# Altium PCB RawLEDArray.PcbDoc
Units mil, origin at the board's own origin, x right, y up, seen from the top; angles counter-clockwise.
Board outline 6000 x 4000 mil, 2 copper layers (Top Layer, Bottom Layer); 185 components, 96 nets, 557 pads, 0 vias.
Unrouted connection lines stored in the file: 460.
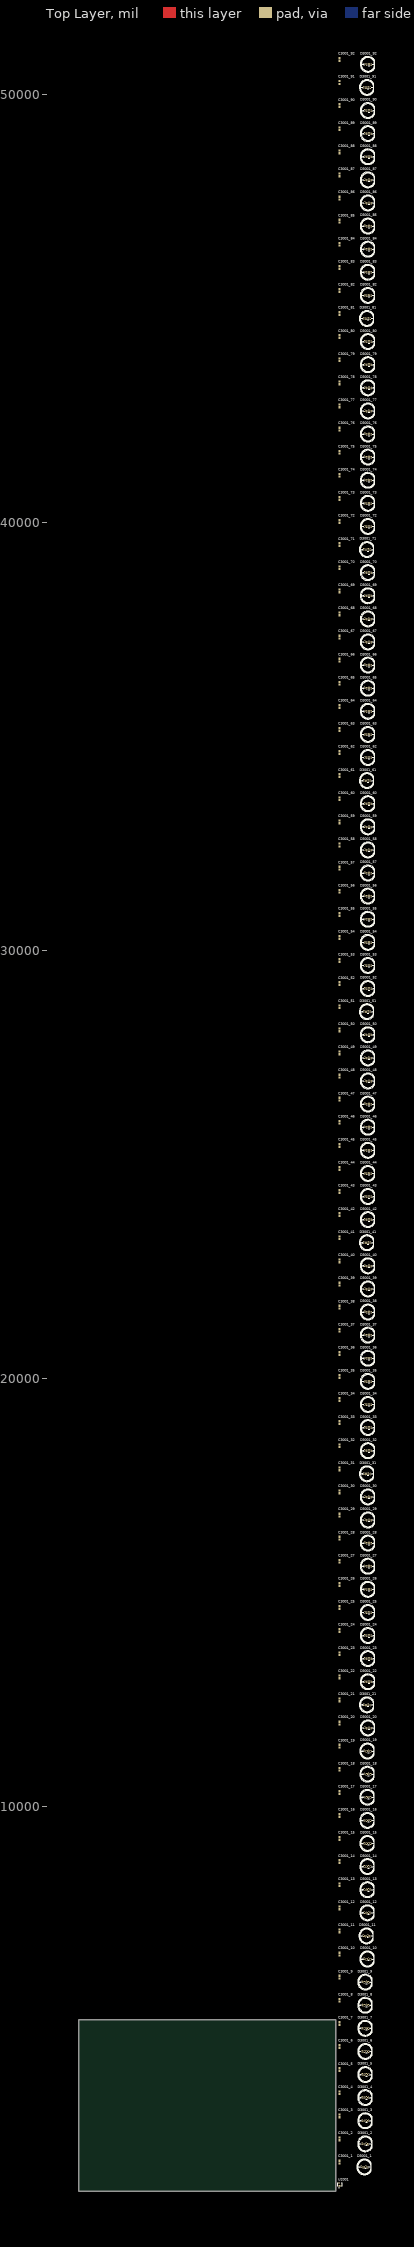
[diagram p0: Top Layer view]
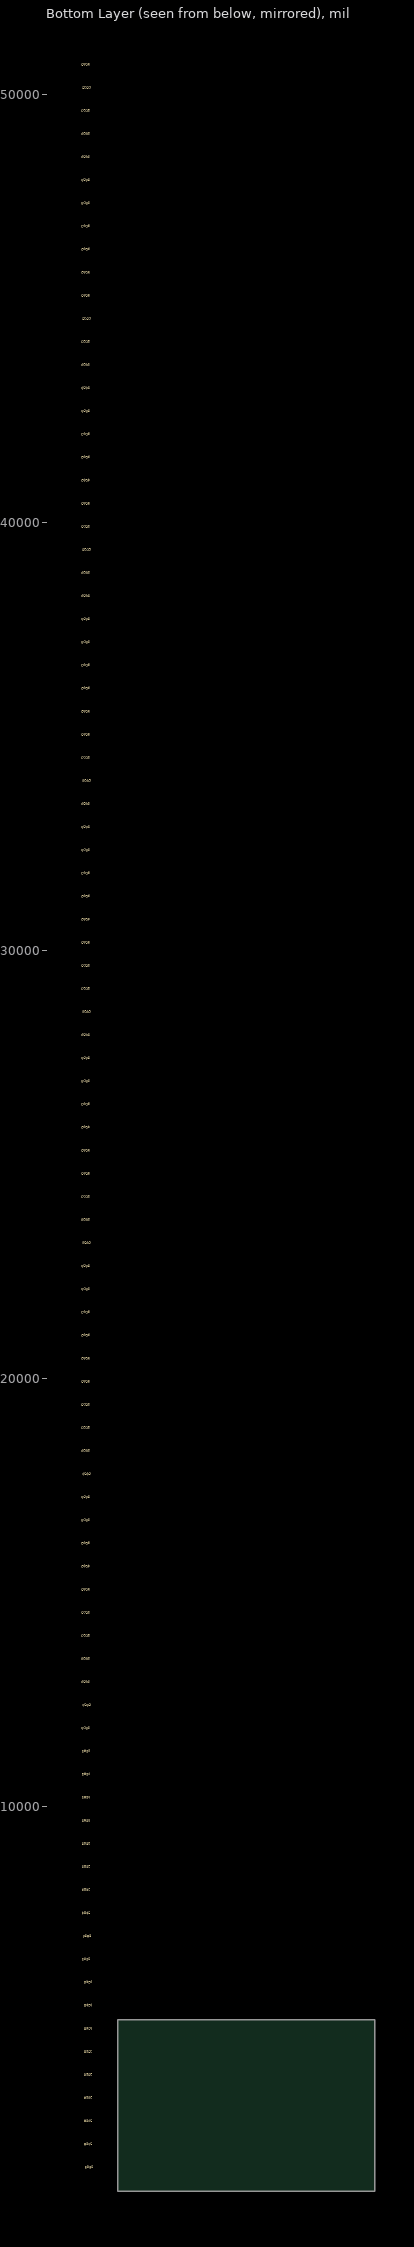
[diagram p1: Bottom Layer view, seen from below]

## Layer stack, top to bottom
Top Solder: solder mask 0.4, Solder Resist, Dk 3.5
Top Layer: signal copper 1.4
Dielectric 1: dielectric 12.6, FR-4, Dk 4.8
Bottom Layer: signal copper 1.4
Bottom Solder: solder mask 0.4, Solder Resist, Dk 3.5

## Board outline
1000,1000 7000,1000 7000,5000 1000,5000

## Design rules (kind name [scope] priority, off if disabled: settings)
Clearance [All] p1: gap=10 ignorepadtopadclearanceinfootprint=FALSE
PolygonConnect [All] p1: connectstyle=Relief reliefconductorwidth=10 reliefentries=4 polygonreliefangle="90 Angle" airgapwidth=10
RoutingVias [All] p1: holewidth=28 width=50 viastyle="Through Hole" minholewidth=28 minwidth=50 maxholewidth=28 maxwidth=50
SolderMaskExpansion [All] p1: expansion=4 istentingtop=FALSE
SupplyNets "Schematic Supply Nets_1" [InNet('GND')] p1: voltage=0.000
SupplyNets "Schematic Supply Nets" [InNet('+5')] p2: voltage=0.000
Width [All] p1: maxlimit=10 minlimit=10 preferedwidth=10
30 further rules are at their usual default settings.

## Classes and differential pairs
channel class LED: U_LED1 U_LED2 U_LED3 U_LED4 U_LED5 U_LED6 U_LED7 U_LED8 U_LED9 U_LED10 U_LED11 U_LED12 U_LED13 U_LED14 U_LED15 U_LED16 U_LED17 U_LED18 U_LED19 U_LED20 U_LED21 U_LED22 U_LED23 U_LED24 U_LED25 U_LED26 U_LED27 U_LED28 U_LED29 U_LED30 U_LED31 U_LED32 U_LED33 U_LED34 U_LED35 U_LED36 U_LED37 U_LED38 U_LED39 U_LED40 U_LED41 U_LED42 U_LED43 U_LED44 U_LED45 U_LED46 U_LED47 U_LED48 U_LED49 U_LED50 U_LED51 U_LED52 U_LED53 U_LED54 U_LED55 U_LED56 U_LED57 U_LED58 U_LED59 U_LED60 U_LED61 U_LED62 U_LED63 U_LED64 U_LED65 U_LED66 U_LED67 U_LED68 U_LED69 U_LED70 U_LED71 U_LED72 U_LED73 U_LED74 U_LED75 U_LED76 U_LED77 U_LED78 U_LED79 U_LED80 U_LED81 U_LED82 U_LED83 U_LED84 U_LED85 U_LED86 U_LED87 U_LED88 U_LED89 U_LED90 U_LED91 U_LED92
net class I[2..92]: I2 I3 I4 I5 I6 I7 I8 I9 I10 I11 I12 I13 I14 I15 I16 I17 I18 I19 I20 I21 I22 I23 I24 I25 I26 I27 I28 I29 I30 I31 I32 I33 I34 I35 I36 I37 I38 I39 I40 I41 I42 I43 I44 I45 I46 I47 I48 I49 I50 I51 I52 I53 I54 I55 I56 I57 I58 I59 I60 I61 I62 I63 I64 I65 I66 I67 I68 I69 I70 I71 I72 I73 I74 I75 I76 I77 I78 I79 I80 I81 I82 I83 I84 I85 I86 I87 I88 I89 I90 I91 I92
component class U_LEDArray: U2001
component class U_LED92: C3001_92 D3001_92
component class U_LED91: C3001_91 D3001_91
component class U_LED90: C3001_90 D3001_90
component class U_LED89: C3001_89 D3001_89
component class U_LED88: C3001_88 D3001_88
component class U_LED87: C3001_87 D3001_87
component class U_LED86: C3001_86 D3001_86
component class U_LED85: C3001_85 D3001_85
component class U_LED84: C3001_84 D3001_84
component class U_LED83: C3001_83 D3001_83
component class U_LED82: C3001_82 D3001_82
component class U_LED81: C3001_81 D3001_81
component class U_LED80: C3001_80 D3001_80
component class U_LED79: C3001_79 D3001_79
component class U_LED78: C3001_78 D3001_78
component class U_LED77: C3001_77 D3001_77
component class U_LED76: C3001_76 D3001_76
component class U_LED75: C3001_75 D3001_75
component class U_LED74: C3001_74 D3001_74
component class U_LED73: C3001_73 D3001_73
component class U_LED72: C3001_72 D3001_72
component class U_LED71: C3001_71 D3001_71
component class U_LED70: C3001_70 D3001_70
component class U_LED69: C3001_69 D3001_69
component class U_LED68: C3001_68 D3001_68
component class U_LED67: C3001_67 D3001_67
component class U_LED66: C3001_66 D3001_66
component class U_LED65: C3001_65 D3001_65
component class U_LED64: C3001_64 D3001_64
component class U_LED63: C3001_63 D3001_63
component class U_LED62: C3001_62 D3001_62
component class U_LED61: C3001_61 D3001_61
component class U_LED60: C3001_60 D3001_60
component class U_LED59: C3001_59 D3001_59
component class U_LED58: C3001_58 D3001_58
component class U_LED57: C3001_57 D3001_57
component class U_LED56: C3001_56 D3001_56
component class U_LED55: C3001_55 D3001_55
component class U_LED54: C3001_54 D3001_54
component class U_LED53: C3001_53 D3001_53
component class U_LED52: C3001_52 D3001_52
component class U_LED51: C3001_51 D3001_51
component class U_LED50: C3001_50 D3001_50
component class U_LED49: C3001_49 D3001_49
component class U_LED48: C3001_48 D3001_48
component class U_LED47: C3001_47 D3001_47
component class U_LED46: C3001_46 D3001_46
component class U_LED45: C3001_45 D3001_45
component class U_LED44: C3001_44 D3001_44
component class U_LED43: C3001_43 D3001_43
component class U_LED42: C3001_42 D3001_42
component class U_LED41: C3001_41 D3001_41
component class U_LED40: C3001_40 D3001_40
component class U_LED39: C3001_39 D3001_39
component class U_LED38: C3001_38 D3001_38
component class U_LED37: C3001_37 D3001_37
component class U_LED36: C3001_36 D3001_36
component class U_LED35: C3001_35 D3001_35
component class U_LED34: C3001_34 D3001_34
component class U_LED33: C3001_33 D3001_33
component class U_LED32: C3001_32 D3001_32
component class U_LED31: C3001_31 D3001_31
component class U_LED30: C3001_30 D3001_30
component class U_LED29: C3001_29 D3001_29
component class U_LED28: C3001_28 D3001_28
component class U_LED27: C3001_27 D3001_27
component class U_LED26: C3001_26 D3001_26
component class U_LED25: C3001_25 D3001_25
component class U_LED24: C3001_24 D3001_24
component class U_LED23: C3001_23 D3001_23
component class U_LED22: C3001_22 D3001_22
component class U_LED21: C3001_21 D3001_21
component class U_LED20: C3001_20 D3001_20
component class U_LED19: C3001_19 D3001_19
component class U_LED18: C3001_18 D3001_18
component class U_LED17: C3001_17 D3001_17
component class U_LED16: C3001_16 D3001_16
component class U_LED15: C3001_15 D3001_15
component class U_LED14: C3001_14 D3001_14
component class U_LED13: C3001_13 D3001_13
component class U_LED12: C3001_12 D3001_12
component class U_LED11: C3001_11 D3001_11
component class U_LED10: C3001_10 D3001_10
component class U_LED9: C3001_9 D3001_9
component class U_LED8: C3001_8 D3001_8
component class U_LED7: C3001_7 D3001_7
component class U_LED6: C3001_6 D3001_6
component class U_LED5: C3001_5 D3001_5
component class U_LED4: C3001_4 D3001_4
component class U_LED3: C3001_3 D3001_3
component class U_LED2: C3001_2 D3001_2
component class U_LED1: C3001_1 D3001_1

## Components (designator, comment, footprint, x,y, rotation, side; value= is the part's Value field where it differs from the comment)
C3001_1 "C0805" CC0805 7090,1680 r90 top (schematic designator C3001)
C3001_2 "C0805" CC0805 7090,2220 r90 top (schematic designator C3001)
C3001_3 "C0805" CC0805 7090,2760 r90 top (schematic designator C3001)
C3001_4 "C0805" CC0805 7090,3300 r90 top (schematic designator C3001)
C3001_5 "C0805" CC0805 7090,3840 r90 top (schematic designator C3001)
C3001_6 "C0805" CC0805 7090,4380 r90 top (schematic designator C3001)
C3001_7 "C0805" CC0805 7090,4920 r90 top (schematic designator C3001)
C3001_8 "C0805" CC0805 7090,5460 r90 top (schematic designator C3001)
C3001_9 "C0805" CC0805 7090,6000 r90 top (schematic designator C3001)
C3001_10 "C0805" CC0805 7090,6540 r90 top (schematic designator C3001)
C3001_11 "C0805" CC0805 7090,7080 r90 top (schematic designator C3001)
C3001_12 "C0805" CC0805 7090,7620 r90 top (schematic designator C3001)
C3001_13 "C0805" CC0805 7090,8160 r90 top (schematic designator C3001)
C3001_14 "C0805" CC0805 7090,8700 r90 top (schematic designator C3001)
C3001_15 "C0805" CC0805 7090,9240 r90 top (schematic designator C3001)
C3001_16 "C0805" CC0805 7090,9780 r90 top (schematic designator C3001)
C3001_17 "C0805" CC0805 7090,10320 r90 top (schematic designator C3001)
C3001_18 "C0805" CC0805 7090,10860 r90 top (schematic designator C3001)
C3001_19 "C0805" CC0805 7090,11400 r90 top (schematic designator C3001)
C3001_20 "C0805" CC0805 7090,11940 r90 top (schematic designator C3001)
C3001_21 "C0805" CC0805 7090,12480 r90 top (schematic designator C3001)
C3001_22 "C0805" CC0805 7090,13020 r90 top (schematic designator C3001)
C3001_23 "C0805" CC0805 7090,13560 r90 top (schematic designator C3001)
C3001_24 "C0805" CC0805 7090,14100 r90 top (schematic designator C3001)
C3001_25 "C0805" CC0805 7090,14640 r90 top (schematic designator C3001)
C3001_26 "C0805" CC0805 7090,15180 r90 top (schematic designator C3001)
C3001_27 "C0805" CC0805 7090,15720 r90 top (schematic designator C3001)
C3001_28 "C0805" CC0805 7090,16260 r90 top (schematic designator C3001)
C3001_29 "C0805" CC0805 7090,16800 r90 top (schematic designator C3001)
C3001_30 "C0805" CC0805 7090,17340 r90 top (schematic designator C3001)
C3001_31 "C0805" CC0805 7090,17880 r90 top (schematic designator C3001)
C3001_32 "C0805" CC0805 7090,18420 r90 top (schematic designator C3001)
C3001_33 "C0805" CC0805 7090,18960 r90 top (schematic designator C3001)
C3001_34 "C0805" CC0805 7090,19500 r90 top (schematic designator C3001)
C3001_35 "C0805" CC0805 7090,20040 r90 top (schematic designator C3001)
C3001_36 "C0805" CC0805 7090,20580 r90 top (schematic designator C3001)
C3001_37 "C0805" CC0805 7090,21120 r90 top (schematic designator C3001)
C3001_38 "C0805" CC0805 7090,21660 r90 top (schematic designator C3001)
C3001_39 "C0805" CC0805 7090,22200 r90 top (schematic designator C3001)
C3001_40 "C0805" CC0805 7090,22740 r90 top (schematic designator C3001)
C3001_41 "C0805" CC0805 7090,23280 r90 top (schematic designator C3001)
C3001_42 "C0805" CC0805 7090,23820 r90 top (schematic designator C3001)
C3001_43 "C0805" CC0805 7090,24360 r90 top (schematic designator C3001)
C3001_44 "C0805" CC0805 7090,24900 r90 top (schematic designator C3001)
C3001_45 "C0805" CC0805 7090,25440 r90 top (schematic designator C3001)
C3001_46 "C0805" CC0805 7090,25980 r90 top (schematic designator C3001)
C3001_47 "C0805" CC0805 7090,26520 r90 top (schematic designator C3001)
C3001_48 "C0805" CC0805 7090,27060 r90 top (schematic designator C3001)
C3001_49 "C0805" CC0805 7090,27600 r90 top (schematic designator C3001)
C3001_50 "C0805" CC0805 7090,28140 r90 top (schematic designator C3001)
C3001_51 "C0805" CC0805 7090,28680 r90 top (schematic designator C3001)
C3001_52 "C0805" CC0805 7090,29220 r90 top (schematic designator C3001)
C3001_53 "C0805" CC0805 7090,29760 r90 top (schematic designator C3001)
C3001_54 "C0805" CC0805 7090,30300 r90 top (schematic designator C3001)
C3001_55 "C0805" CC0805 7090,30840 r90 top (schematic designator C3001)
C3001_56 "C0805" CC0805 7090,31380 r90 top (schematic designator C3001)
C3001_57 "C0805" CC0805 7090,31920 r90 top (schematic designator C3001)
C3001_58 "C0805" CC0805 7090,32460 r90 top (schematic designator C3001)
C3001_59 "C0805" CC0805 7090,33000 r90 top (schematic designator C3001)
C3001_60 "C0805" CC0805 7090,33540 r90 top (schematic designator C3001)
C3001_61 "C0805" CC0805 7090,34080 r90 top (schematic designator C3001)
C3001_62 "C0805" CC0805 7090,34620 r90 top (schematic designator C3001)
C3001_63 "C0805" CC0805 7090,35160 r90 top (schematic designator C3001)
C3001_64 "C0805" CC0805 7090,35700 r90 top (schematic designator C3001)
C3001_65 "C0805" CC0805 7090,36240 r90 top (schematic designator C3001)
C3001_66 "C0805" CC0805 7090,36780 r90 top (schematic designator C3001)
C3001_67 "C0805" CC0805 7090,37320 r90 top (schematic designator C3001)
C3001_68 "C0805" CC0805 7090,37860 r90 top (schematic designator C3001)
C3001_69 "C0805" CC0805 7090,38400 r90 top (schematic designator C3001)
C3001_70 "C0805" CC0805 7090,38940 r90 top (schematic designator C3001)
C3001_71 "C0805" CC0805 7090,39480 r90 top (schematic designator C3001)
C3001_72 "C0805" CC0805 7090,40020 r90 top (schematic designator C3001)
C3001_73 "C0805" CC0805 7090,40560 r90 top (schematic designator C3001)
C3001_74 "C0805" CC0805 7090,41100 r90 top (schematic designator C3001)
C3001_75 "C0805" CC0805 7090,41640 r90 top (schematic designator C3001)
C3001_76 "C0805" CC0805 7090,42180 r90 top (schematic designator C3001)
C3001_77 "C0805" CC0805 7090,42720 r90 top (schematic designator C3001)
C3001_78 "C0805" CC0805 7090,43260 r90 top (schematic designator C3001)
C3001_79 "C0805" CC0805 7090,43800 r90 top (schematic designator C3001)
C3001_80 "C0805" CC0805 7090,44340 r90 top (schematic designator C3001)
C3001_81 "C0805" CC0805 7090,44880 r90 top (schematic designator C3001)
C3001_82 "C0805" CC0805 7090,45420 r90 top (schematic designator C3001)
C3001_83 "C0805" CC0805 7090,45960 r90 top (schematic designator C3001)
C3001_84 "C0805" CC0805 7090,46500 r90 top (schematic designator C3001)
C3001_85 "C0805" CC0805 7090,47040 r90 top (schematic designator C3001)
C3001_86 "C0805" CC0805 7090,47580 r90 top (schematic designator C3001)
C3001_87 "C0805" CC0805 7090,48120 r90 top (schematic designator C3001)
C3001_88 "C0805" CC0805 7090,48660 r90 top (schematic designator C3001)
C3001_89 "C0805" CC0805 7090,49200 r90 top (schematic designator C3001)
C3001_90 "C0805" CC0805 7090,49740 r90 top (schematic designator C3001)
C3001_91 "C0805" CC0805 7090,50280 r90 top (schematic designator C3001)
C3001_92 "C0805" CC0805 7090,50820 r90 top (schematic designator C3001)
D3001_1 "WS2812B_F8" WS2812B_F8 7675,1565 r0 top (schematic designator D3001)
D3001_2 "WS2812B_F8" WS2812B_F8 7695,2105 r0 top (schematic designator D3001)
D3001_3 "WS2812B_F8" WS2812B_F8 7695,2645 r0 top (schematic designator D3001)
D3001_4 "WS2812B_F8" WS2812B_F8 7695,3185 r0 top (schematic designator D3001)
D3001_5 "WS2812B_F8" WS2812B_F8 7695,3725 r0 top (schematic designator D3001)
D3001_6 "WS2812B_F8" WS2812B_F8 7695,4265 r0 top (schematic designator D3001)
D3001_7 "WS2812B_F8" WS2812B_F8 7695,4805 r0 top (schematic designator D3001)
D3001_8 "WS2812B_F8" WS2812B_F8 7695,5345 r0 top (schematic designator D3001)
D3001_9 "WS2812B_F8" WS2812B_F8 7695,5885 r0 top (schematic designator D3001)
D3001_10 "WS2812B_F8" WS2812B_F8 7745,6425 r0 top (schematic designator D3001)
D3001_11 "WS2812B_F8" WS2812B_F8 7725,6965 r0 top (schematic designator D3001)
D3001_12 "WS2812B_F8" WS2812B_F8 7745,7505 r0 top (schematic designator D3001)
D3001_13 "WS2812B_F8" WS2812B_F8 7745,8045 r0 top (schematic designator D3001)
D3001_14 "WS2812B_F8" WS2812B_F8 7745,8585 r0 top (schematic designator D3001)
D3001_15 "WS2812B_F8" WS2812B_F8 7745,9125 r0 top (schematic designator D3001)
D3001_16 "WS2812B_F8" WS2812B_F8 7745,9665 r0 top (schematic designator D3001)
D3001_17 "WS2812B_F8" WS2812B_F8 7745,10205 r0 top (schematic designator D3001)
D3001_18 "WS2812B_F8" WS2812B_F8 7745,10745 r0 top (schematic designator D3001)
D3001_19 "WS2812B_F8" WS2812B_F8 7745,11285 r0 top (schematic designator D3001)
D3001_20 "WS2812B_F8" WS2812B_F8 7755,11825 r0 top (schematic designator D3001)
D3001_21 "WS2812B_F8" WS2812B_F8 7735,12365 r0 top (schematic designator D3001)
D3001_22 "WS2812B_F8" WS2812B_F8 7755,12905 r0 top (schematic designator D3001)
D3001_23 "WS2812B_F8" WS2812B_F8 7755,13445 r0 top (schematic designator D3001)
D3001_24 "WS2812B_F8" WS2812B_F8 7755,13985 r0 top (schematic designator D3001)
D3001_25 "WS2812B_F8" WS2812B_F8 7755,14525 r0 top (schematic designator D3001)
D3001_26 "WS2812B_F8" WS2812B_F8 7755,15065 r0 top (schematic designator D3001)
D3001_27 "WS2812B_F8" WS2812B_F8 7755,15605 r0 top (schematic designator D3001)
D3001_28 "WS2812B_F8" WS2812B_F8 7755,16145 r0 top (schematic designator D3001)
D3001_29 "WS2812B_F8" WS2812B_F8 7755,16685 r0 top (schematic designator D3001)
D3001_30 "WS2812B_F8" WS2812B_F8 7755,17225 r0 top (schematic designator D3001)
D3001_31 "WS2812B_F8" WS2812B_F8 7735,17765 r0 top (schematic designator D3001)
D3001_32 "WS2812B_F8" WS2812B_F8 7755,18305 r0 top (schematic designator D3001)
D3001_33 "WS2812B_F8" WS2812B_F8 7755,18845 r0 top (schematic designator D3001)
D3001_34 "WS2812B_F8" WS2812B_F8 7755,19385 r0 top (schematic designator D3001)
D3001_35 "WS2812B_F8" WS2812B_F8 7755,19925 r0 top (schematic designator D3001)
D3001_36 "WS2812B_F8" WS2812B_F8 7755,20465 r0 top (schematic designator D3001)
D3001_37 "WS2812B_F8" WS2812B_F8 7755,21005 r0 top (schematic designator D3001)
D3001_38 "WS2812B_F8" WS2812B_F8 7755,21545 r0 top (schematic designator D3001)
D3001_39 "WS2812B_F8" WS2812B_F8 7755,22085 r0 top (schematic designator D3001)
D3001_40 "WS2812B_F8" WS2812B_F8 7755,22625 r0 top (schematic designator D3001)
D3001_41 "WS2812B_F8" WS2812B_F8 7735,23165 r0 top (schematic designator D3001)
D3001_42 "WS2812B_F8" WS2812B_F8 7755,23705 r0 top (schematic designator D3001)
D3001_43 "WS2812B_F8" WS2812B_F8 7755,24245 r0 top (schematic designator D3001)
D3001_44 "WS2812B_F8" WS2812B_F8 7755,24785 r0 top (schematic designator D3001)
D3001_45 "WS2812B_F8" WS2812B_F8 7755,25325 r0 top (schematic designator D3001)
D3001_46 "WS2812B_F8" WS2812B_F8 7755,25865 r0 top (schematic designator D3001)
D3001_47 "WS2812B_F8" WS2812B_F8 7755,26405 r0 top (schematic designator D3001)
D3001_48 "WS2812B_F8" WS2812B_F8 7755,26945 r0 top (schematic designator D3001)
D3001_49 "WS2812B_F8" WS2812B_F8 7755,27485 r0 top (schematic designator D3001)
D3001_50 "WS2812B_F8" WS2812B_F8 7755,28025 r0 top (schematic designator D3001)
D3001_51 "WS2812B_F8" WS2812B_F8 7735,28565 r0 top (schematic designator D3001)
D3001_52 "WS2812B_F8" WS2812B_F8 7755,29105 r0 top (schematic designator D3001)
D3001_53 "WS2812B_F8" WS2812B_F8 7755,29645 r0 top (schematic designator D3001)
D3001_54 "WS2812B_F8" WS2812B_F8 7755,30185 r0 top (schematic designator D3001)
D3001_55 "WS2812B_F8" WS2812B_F8 7755,30725 r0 top (schematic designator D3001)
D3001_56 "WS2812B_F8" WS2812B_F8 7755,31265 r0 top (schematic designator D3001)
D3001_57 "WS2812B_F8" WS2812B_F8 7755,31805 r0 top (schematic designator D3001)
D3001_58 "WS2812B_F8" WS2812B_F8 7755,32345 r0 top (schematic designator D3001)
D3001_59 "WS2812B_F8" WS2812B_F8 7755,32885 r0 top (schematic designator D3001)
D3001_60 "WS2812B_F8" WS2812B_F8 7755,33425 r0 top (schematic designator D3001)
D3001_61 "WS2812B_F8" WS2812B_F8 7735,33965 r0 top (schematic designator D3001)
D3001_62 "WS2812B_F8" WS2812B_F8 7755,34505 r0 top (schematic designator D3001)
D3001_63 "WS2812B_F8" WS2812B_F8 7755,35045 r0 top (schematic designator D3001)
D3001_64 "WS2812B_F8" WS2812B_F8 7755,35585 r0 top (schematic designator D3001)
D3001_65 "WS2812B_F8" WS2812B_F8 7755,36125 r0 top (schematic designator D3001)
D3001_66 "WS2812B_F8" WS2812B_F8 7755,36665 r0 top (schematic designator D3001)
D3001_67 "WS2812B_F8" WS2812B_F8 7755,37205 r0 top (schematic designator D3001)
D3001_68 "WS2812B_F8" WS2812B_F8 7755,37745 r0 top (schematic designator D3001)
D3001_69 "WS2812B_F8" WS2812B_F8 7755,38285 r0 top (schematic designator D3001)
D3001_70 "WS2812B_F8" WS2812B_F8 7755,38825 r0 top (schematic designator D3001)
D3001_71 "WS2812B_F8" WS2812B_F8 7735,39365 r0 top (schematic designator D3001)
D3001_72 "WS2812B_F8" WS2812B_F8 7755,39905 r0 top (schematic designator D3001)
D3001_73 "WS2812B_F8" WS2812B_F8 7755,40445 r0 top (schematic designator D3001)
D3001_74 "WS2812B_F8" WS2812B_F8 7755,40985 r0 top (schematic designator D3001)
D3001_75 "WS2812B_F8" WS2812B_F8 7755,41525 r0 top (schematic designator D3001)
D3001_76 "WS2812B_F8" WS2812B_F8 7755,42065 r0 top (schematic designator D3001)
D3001_77 "WS2812B_F8" WS2812B_F8 7755,42605 r0 top (schematic designator D3001)
D3001_78 "WS2812B_F8" WS2812B_F8 7755,43145 r0 top (schematic designator D3001)
D3001_79 "WS2812B_F8" WS2812B_F8 7755,43685 r0 top (schematic designator D3001)
D3001_80 "WS2812B_F8" WS2812B_F8 7755,44225 r0 top (schematic designator D3001)
D3001_81 "WS2812B_F8" WS2812B_F8 7735,44765 r0 top (schematic designator D3001)
D3001_82 "WS2812B_F8" WS2812B_F8 7755,45305 r0 top (schematic designator D3001)
D3001_83 "WS2812B_F8" WS2812B_F8 7755,45845 r0 top (schematic designator D3001)
D3001_84 "WS2812B_F8" WS2812B_F8 7755,46385 r0 top (schematic designator D3001)
D3001_85 "WS2812B_F8" WS2812B_F8 7755,46925 r0 top (schematic designator D3001)
D3001_86 "WS2812B_F8" WS2812B_F8 7755,47465 r0 top (schematic designator D3001)
D3001_87 "WS2812B_F8" WS2812B_F8 7755,48005 r0 top (schematic designator D3001)
D3001_88 "WS2812B_F8" WS2812B_F8 7755,48545 r0 top (schematic designator D3001)
D3001_89 "WS2812B_F8" WS2812B_F8 7755,49085 r0 top (schematic designator D3001)
D3001_90 "WS2812B_F8" WS2812B_F8 7755,49625 r0 top (schematic designator D3001)
D3001_91 "WS2812B_F8" WS2812B_F8 7735,50165 r0 top (schematic designator D3001)
D3001_92 "WS2812B_F8" WS2812B_F8 7755,50705 r0 top (schematic designator D3001)
U2001 "SN74LV1T34DCKR" FP-DCK0005A-IPC_C 7105,1155 r90 top

## Footprints (in the part's own frame and the unit in brackets; to place one, negate y for a bottom-side part, rotate by r counter-clockwise, add the part's x,y. Pads: shape width x height; smd on the part's side, far side on the other; paste and mask are expansions set on the pad)
CC0805 [mm] "Ceramic Capacitor 0805"
  rect 1.3x1.4 smd: 1(-0.8,0) 2(0.8,0)
  body extent -1.1,-0.67 1.1,0.67, height 1.4
FP-DCK0005A-IPC_C [mm]
  rect 1.164x0.336 smd paste+0 mask+0: 1(-0.77,0.65)
  rrect100% 1.164x0.336 smd paste+0 mask+0: 2(-0.77,0) 3(-0.77,-0.65) 4(0.77,-0.65) 5(0.77,0.65)
  silkscreen extent -2.05,-1.25 1.05,1.25
WS2812B_F8 [mm] "WS2812B 8mm LED"
  oval 1x1.5 hole 0.5: 1(-1.905,0.125) 2(-0.635,-0.125) 3(0.635,0.125) 4(1.905,-0.125)
  silkscreen extent -4.6,-4.6 4,4.6

## Part data
C3001_1 C3001_2 C3001_3 C3001_4 C3001_5 C3001_6 C3001_7 C3001_8 C3001_9 C3001_10 C3001_11 C3001_12 C3001_13 C3001_14 C3001_15 C3001_16 C3001_17 C3001_18 C3001_19 C3001_20 C3001_21 C3001_22 C3001_23 C3001_24 C3001_25 C3001_26 C3001_27 C3001_28 C3001_29 C3001_30 C3001_31 C3001_32 C3001_33 C3001_34 C3001_35 C3001_36 C3001_37 C3001_38 C3001_39 C3001_40 C3001_41 C3001_42 C3001_43 C3001_44 C3001_45 C3001_46 C3001_47 C3001_48 C3001_49 C3001_50 C3001_51 C3001_52 C3001_53 C3001_54 C3001_55 C3001_56 C3001_57 C3001_58 C3001_59 C3001_60 C3001_61 C3001_62 C3001_63 C3001_64 C3001_65 C3001_66 C3001_67 C3001_68 C3001_69 C3001_70 C3001_71 C3001_72 C3001_73 C3001_74 C3001_75 C3001_76 C3001_77 C3001_78 C3001_79 C3001_80 C3001_81 C3001_82 C3001_83 C3001_84 C3001_85 C3001_86 C3001_87 C3001_88 C3001_89 C3001_90 C3001_91 C3001_92: "Capacitor", Capacitance=100nF, Tolerance=±?%, Voltage=6.3V
D3001_1 D3001_2 D3001_3 D3001_4 D3001_5 D3001_6 D3001_7 D3001_8 D3001_9 D3001_10 D3001_11 D3001_12 D3001_13 D3001_14 D3001_15 D3001_16 D3001_17 D3001_18 D3001_19 D3001_20 D3001_21 D3001_22 D3001_23 D3001_24 D3001_25 D3001_26 D3001_27 D3001_28 D3001_29 D3001_30 D3001_31 D3001_32 D3001_33 D3001_34 D3001_35 D3001_36 D3001_37 D3001_38 D3001_39 D3001_40 D3001_41 D3001_42 D3001_43 D3001_44 D3001_45 D3001_46 D3001_47 D3001_48 D3001_49 D3001_50 D3001_51 D3001_52 D3001_53 D3001_54 D3001_55 D3001_56 D3001_57 D3001_58 D3001_59 D3001_60 D3001_61 D3001_62 D3001_63 D3001_64 D3001_65 D3001_66 D3001_67 D3001_68 D3001_69 D3001_70 D3001_71 D3001_72 D3001_73 D3001_74 D3001_75 D3001_76 D3001_77 D3001_78 D3001_79 D3001_80 D3001_81 D3001_82 D3001_83 D3001_84 D3001_85 D3001_86 D3001_87 D3001_88 D3001_89 D3001_90 D3001_91 D3001_92: "Addressable 8mm LED", Voltage=5V
U2001: library part CMP-0859-00371-4, "IC BUF NON-INVERT 5.5V SC70-5", Case/Package=SC, High Level Output Current=-8mA, Low Level Output Current=8mA, Max Operating Temperature=125°C, Max Supply Voltage=5.5V, Min Operating Temperature=-40°C, Min Supply Voltage=1.6V, Package Quantity=3000, Quiescent Current=1uA, Contact Plating=Gold, Lead Free="Lead Free", Logic Function=Buffer, Mount="Surface Mount", Number of Bits=1, Number of Bits per Element=1, Number of Channels=1, Number of Elements=1, Number of Input Lines=1, Number of Inputs=1, Number of Output Lines=1, Number of Outputs=1, Number of Pins=5, Operating Supply Current=8mA, Packaging="Tape and Reel", Polarity=Non-Inverting, Propagation Delay=15.5ns, Radiation Hardening=No, REACH SVHC="No SVHC", Weight=0.000215oz

## Nets (pads, with @x,y where several pads share a name; then routed paths per layer and width w, separated by ;. In a path a pad name is that pad's centre, name@x,y a point inside that pad or via, vN(x,y) a via of type N, cw(c..) or ccw(c..) an arc to the next point about the centre after c; other vN are vias at no path point)
+5: C3001_1.2 C3001_2.2 C3001_3.2 C3001_4.2 C3001_5.2 C3001_6.2 C3001_7.2 C3001_8.2 C3001_9.2 C3001_10.2 C3001_11.2 C3001_12.2 C3001_13.2 C3001_14.2 C3001_15.2 C3001_16.2 C3001_17.2 C3001_18.2 C3001_19.2 C3001_20.2 C3001_21.2 C3001_22.2 C3001_23.2 C3001_24.2 C3001_25.2 C3001_26.2 C3001_27.2 C3001_28.2 C3001_29.2 C3001_30.2 C3001_31.2 C3001_32.2 C3001_33.2 C3001_34.2 C3001_35.2 C3001_36.2 C3001_37.2 C3001_38.2 C3001_39.2 C3001_40.2 C3001_41.2 C3001_42.2 C3001_43.2 C3001_44.2 C3001_45.2 C3001_46.2 C3001_47.2 C3001_48.2 C3001_49.2 C3001_50.2 C3001_51.2 C3001_52.2 C3001_53.2 C3001_54.2 C3001_55.2 C3001_56.2 C3001_57.2 C3001_58.2 C3001_59.2 C3001_60.2 C3001_61.2 C3001_62.2 C3001_63.2 C3001_64.2 C3001_65.2 C3001_66.2 C3001_67.2 C3001_68.2 C3001_69.2 C3001_70.2 C3001_71.2 C3001_72.2 C3001_73.2 C3001_74.2 C3001_75.2 C3001_76.2 C3001_77.2 C3001_78.2 C3001_79.2 C3001_80.2 C3001_81.2 C3001_82.2 C3001_83.2 C3001_84.2 C3001_85.2 C3001_86.2 C3001_87.2 C3001_88.2 C3001_89.2 C3001_90.2 C3001_91.2 C3001_92.2 D3001_1.2 D3001_2.2 D3001_3.2 D3001_4.2 D3001_5.2 D3001_6.2 D3001_7.2 D3001_8.2 D3001_9.2 D3001_10.2 D3001_11.2 D3001_12.2 D3001_13.2 D3001_14.2 D3001_15.2 D3001_16.2 D3001_17.2 D3001_18.2 D3001_19.2 D3001_20.2 D3001_21.2 D3001_22.2 D3001_23.2 D3001_24.2 D3001_25.2 D3001_26.2 D3001_27.2 D3001_28.2 D3001_29.2 D3001_30.2 D3001_31.2 D3001_32.2 D3001_33.2 D3001_34.2 D3001_35.2 D3001_36.2 D3001_37.2 D3001_38.2 D3001_39.2 D3001_40.2 D3001_41.2 D3001_42.2 D3001_43.2 D3001_44.2 D3001_45.2 D3001_46.2 D3001_47.2 D3001_48.2 D3001_49.2 D3001_50.2 D3001_51.2 D3001_52.2 D3001_53.2 D3001_54.2 D3001_55.2 D3001_56.2 D3001_57.2 D3001_58.2 D3001_59.2 D3001_60.2 D3001_61.2 D3001_62.2 D3001_63.2 D3001_64.2 D3001_65.2 D3001_66.2 D3001_67.2 D3001_68.2 D3001_69.2 D3001_70.2 D3001_71.2 D3001_72.2 D3001_73.2 D3001_74.2 D3001_75.2 D3001_76.2 D3001_77.2 D3001_78.2 D3001_79.2 D3001_80.2 D3001_81.2 D3001_82.2 D3001_83.2 D3001_84.2 D3001_85.2 D3001_86.2 D3001_87.2 D3001_88.2 D3001_89.2 D3001_90.2 D3001_91.2 D3001_92.2 U2001.5
GND: C3001_1.1 C3001_2.1 C3001_3.1 C3001_4.1 C3001_5.1 C3001_6.1 C3001_7.1 C3001_8.1 C3001_9.1 C3001_10.1 C3001_11.1 C3001_12.1 C3001_13.1 C3001_14.1 C3001_15.1 C3001_16.1 C3001_17.1 C3001_18.1 C3001_19.1 C3001_20.1 C3001_21.1 C3001_22.1 C3001_23.1 C3001_24.1 C3001_25.1 C3001_26.1 C3001_27.1 C3001_28.1 C3001_29.1 C3001_30.1 C3001_31.1 C3001_32.1 C3001_33.1 C3001_34.1 C3001_35.1 C3001_36.1 C3001_37.1 C3001_38.1 C3001_39.1 C3001_40.1 C3001_41.1 C3001_42.1 C3001_43.1 C3001_44.1 C3001_45.1 C3001_46.1 C3001_47.1 C3001_48.1 C3001_49.1 C3001_50.1 C3001_51.1 C3001_52.1 C3001_53.1 C3001_54.1 C3001_55.1 C3001_56.1 C3001_57.1 C3001_58.1 C3001_59.1 C3001_60.1 C3001_61.1 C3001_62.1 C3001_63.1 C3001_64.1 C3001_65.1 C3001_66.1 C3001_67.1 C3001_68.1 C3001_69.1 C3001_70.1 C3001_71.1 C3001_72.1 C3001_73.1 C3001_74.1 C3001_75.1 C3001_76.1 C3001_77.1 C3001_78.1 C3001_79.1 C3001_80.1 C3001_81.1 C3001_82.1 C3001_83.1 C3001_84.1 C3001_85.1 C3001_86.1 C3001_87.1 C3001_88.1 C3001_89.1 C3001_90.1 C3001_91.1 C3001_92.1 D3001_1.3 D3001_2.3 D3001_3.3 D3001_4.3 D3001_5.3 D3001_6.3 D3001_7.3 D3001_8.3 D3001_9.3 D3001_10.3 D3001_11.3 D3001_12.3 D3001_13.3 D3001_14.3 D3001_15.3 D3001_16.3 D3001_17.3 D3001_18.3 D3001_19.3 D3001_20.3 D3001_21.3 D3001_22.3 D3001_23.3 D3001_24.3 D3001_25.3 D3001_26.3 D3001_27.3 D3001_28.3 D3001_29.3 D3001_30.3 D3001_31.3 D3001_32.3 D3001_33.3 D3001_34.3 D3001_35.3 D3001_36.3 D3001_37.3 D3001_38.3 D3001_39.3 D3001_40.3 D3001_41.3 D3001_42.3 D3001_43.3 D3001_44.3 D3001_45.3 D3001_46.3 D3001_47.3 D3001_48.3 D3001_49.3 D3001_50.3 D3001_51.3 D3001_52.3 D3001_53.3 D3001_54.3 D3001_55.3 D3001_56.3 D3001_57.3 D3001_58.3 D3001_59.3 D3001_60.3 D3001_61.3 D3001_62.3 D3001_63.3 D3001_64.3 D3001_65.3 D3001_66.3 D3001_67.3 D3001_68.3 D3001_69.3 D3001_70.3 D3001_71.3 D3001_72.3 D3001_73.3 D3001_74.3 D3001_75.3 D3001_76.3 D3001_77.3 D3001_78.3 D3001_79.3 D3001_80.3 D3001_81.3 D3001_82.3 D3001_83.3 D3001_84.3 D3001_85.3 D3001_86.3 D3001_87.3 D3001_88.3 D3001_89.3 D3001_90.3 D3001_91.3 D3001_92.3 U2001.3
I1: D3001_1.1 U2001.4
I2: D3001_1.4 D3001_2.1
I3: D3001_2.4 D3001_3.1
I4: D3001_3.4 D3001_4.1
I5: D3001_4.4 D3001_5.1
I6: D3001_5.4 D3001_6.1
I7: D3001_6.4 D3001_7.1
I8: D3001_7.4 D3001_8.1
I9: D3001_8.4 D3001_9.1
I10: D3001_9.4 D3001_10.1
I11: D3001_10.4 D3001_11.1
I12: D3001_11.4 D3001_12.1
I13: D3001_12.4 D3001_13.1
I14: D3001_13.4 D3001_14.1
I15: D3001_14.4 D3001_15.1
I16: D3001_15.4 D3001_16.1
I17: D3001_16.4 D3001_17.1
I18: D3001_17.4 D3001_18.1
I19: D3001_18.4 D3001_19.1
I20: D3001_19.4 D3001_20.1
I21: D3001_20.4 D3001_21.1
I22: D3001_21.4 D3001_22.1
I23: D3001_22.4 D3001_23.1
I24: D3001_23.4 D3001_24.1
I25: D3001_24.4 D3001_25.1
I26: D3001_25.4 D3001_26.1
I27: D3001_26.4 D3001_27.1
I28: D3001_27.4 D3001_28.1
I29: D3001_28.4 D3001_29.1
I30: D3001_29.4 D3001_30.1
I31: D3001_30.4 D3001_31.1
I32: D3001_31.4 D3001_32.1
I33: D3001_32.4 D3001_33.1
I34: D3001_33.4 D3001_34.1
I35: D3001_34.4 D3001_35.1
I36: D3001_35.4 D3001_36.1
I37: D3001_36.4 D3001_37.1
I38: D3001_37.4 D3001_38.1
I39: D3001_38.4 D3001_39.1
I40: D3001_39.4 D3001_40.1
I41: D3001_40.4 D3001_41.1
I42: D3001_41.4 D3001_42.1
I43: D3001_42.4 D3001_43.1
I44: D3001_43.4 D3001_44.1
I45: D3001_44.4 D3001_45.1
I46: D3001_45.4 D3001_46.1
I47: D3001_46.4 D3001_47.1
I48: D3001_47.4 D3001_48.1
I49: D3001_48.4 D3001_49.1
I50: D3001_49.4 D3001_50.1
I51: D3001_50.4 D3001_51.1
I52: D3001_51.4 D3001_52.1
I53: D3001_52.4 D3001_53.1
I54: D3001_53.4 D3001_54.1
I55: D3001_54.4 D3001_55.1
I56: D3001_55.4 D3001_56.1
I57: D3001_56.4 D3001_57.1
I58: D3001_57.4 D3001_58.1
I59: D3001_58.4 D3001_59.1
I60: D3001_59.4 D3001_60.1
I61: D3001_60.4 D3001_61.1
I62: D3001_61.4 D3001_62.1
I63: D3001_62.4 D3001_63.1
I64: D3001_63.4 D3001_64.1
I65: D3001_64.4 D3001_65.1
I66: D3001_65.4 D3001_66.1
I67: D3001_66.4 D3001_67.1
I68: D3001_67.4 D3001_68.1
I69: D3001_68.4 D3001_69.1
I70: D3001_69.4 D3001_70.1
I71: D3001_70.4 D3001_71.1
I72: D3001_71.4 D3001_72.1
I73: D3001_72.4 D3001_73.1
I74: D3001_73.4 D3001_74.1
I75: D3001_74.4 D3001_75.1
I76: D3001_75.4 D3001_76.1
I77: D3001_76.4 D3001_77.1
I78: D3001_77.4 D3001_78.1
I79: D3001_78.4 D3001_79.1
I80: D3001_79.4 D3001_80.1
I81: D3001_80.4 D3001_81.1
I82: D3001_81.4 D3001_82.1
I83: D3001_82.4 D3001_83.1
I84: D3001_83.4 D3001_84.1
I85: D3001_84.4 D3001_85.1
I86: D3001_85.4 D3001_86.1
I87: D3001_86.4 D3001_87.1
I88: D3001_87.4 D3001_88.1
I89: D3001_88.4 D3001_89.1
I90: D3001_89.4 D3001_90.1
I91: D3001_90.4 D3001_91.1
I92: D3001_91.4 D3001_92.1
NetU2001_2: U2001.2
O92: D3001_92.4
pads on no net: U2001.1